# Altium PCB PCB2.PcbDoc
Units mm, origin at the board's own origin, x right, y up, seen from the top; angles counter-clockwise.
Board outline 144 x 100 mm, 2 copper layers (Top Layer, Bottom Layer); 28 components, 82 nets, 267 pads, 46 vias.
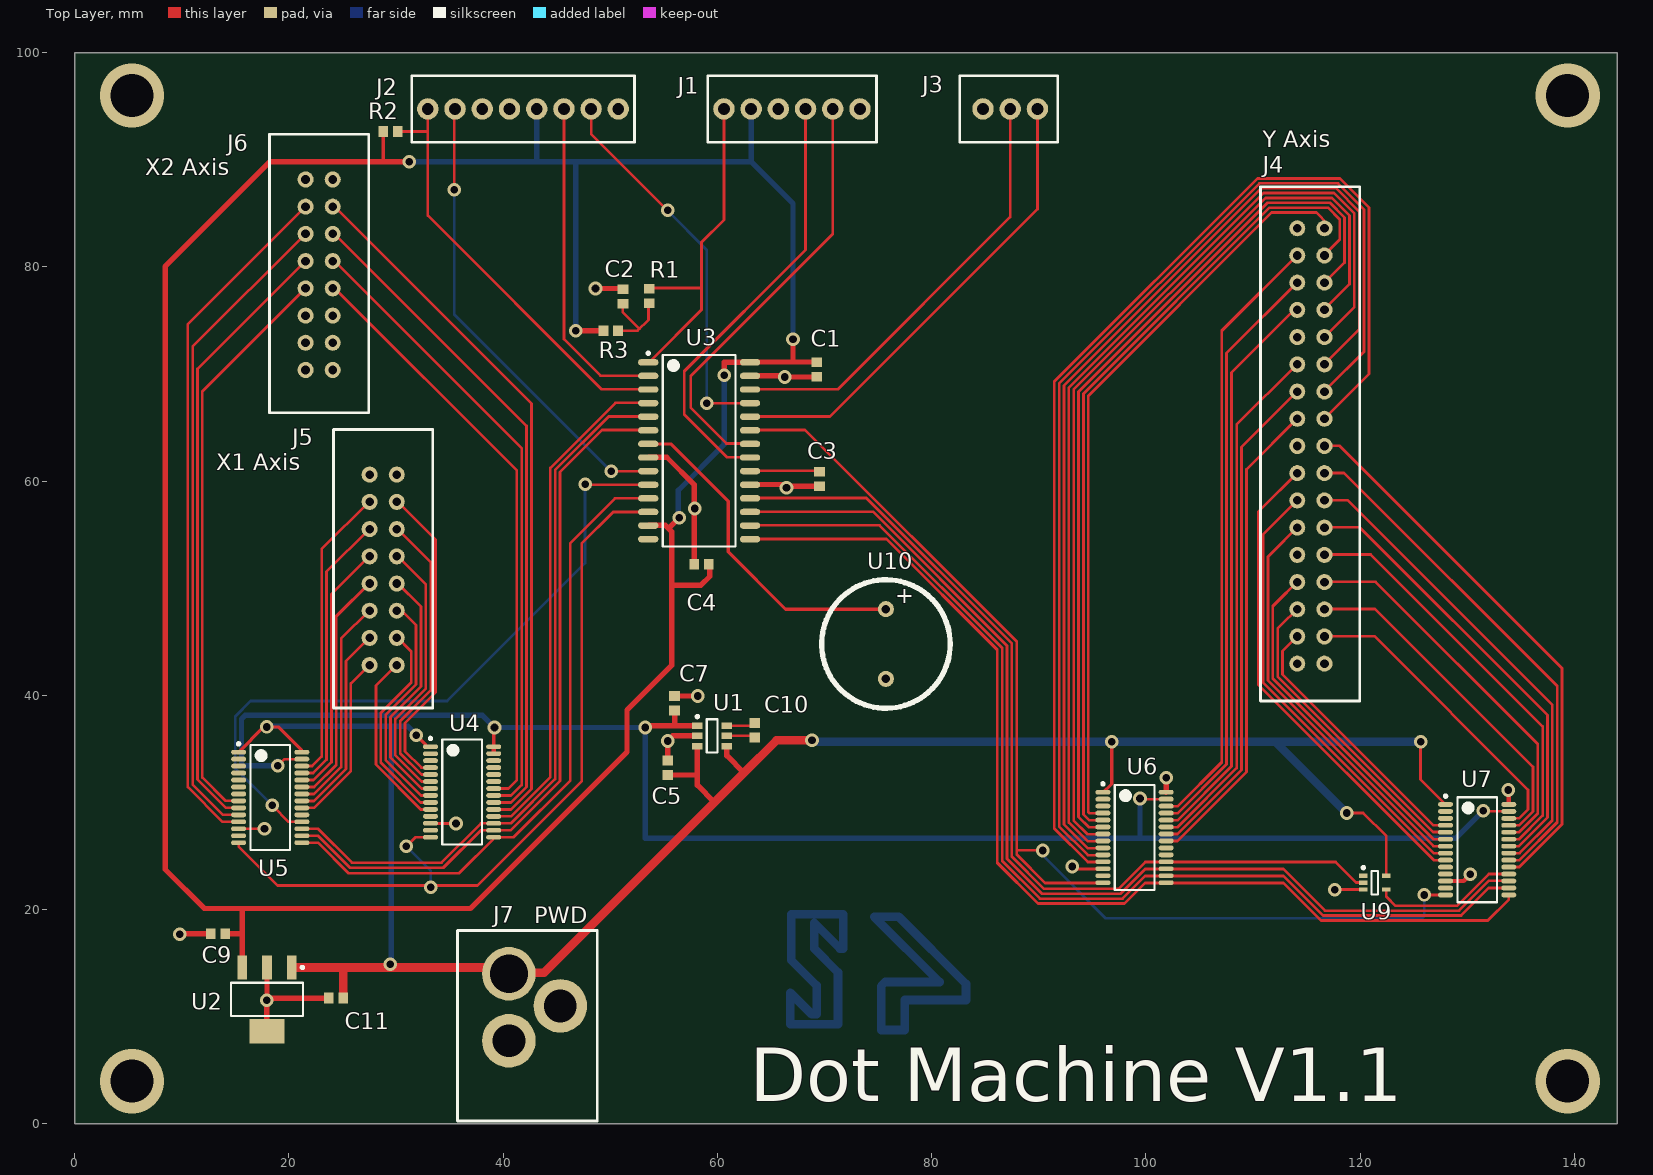
[diagram p0: Top Layer view]
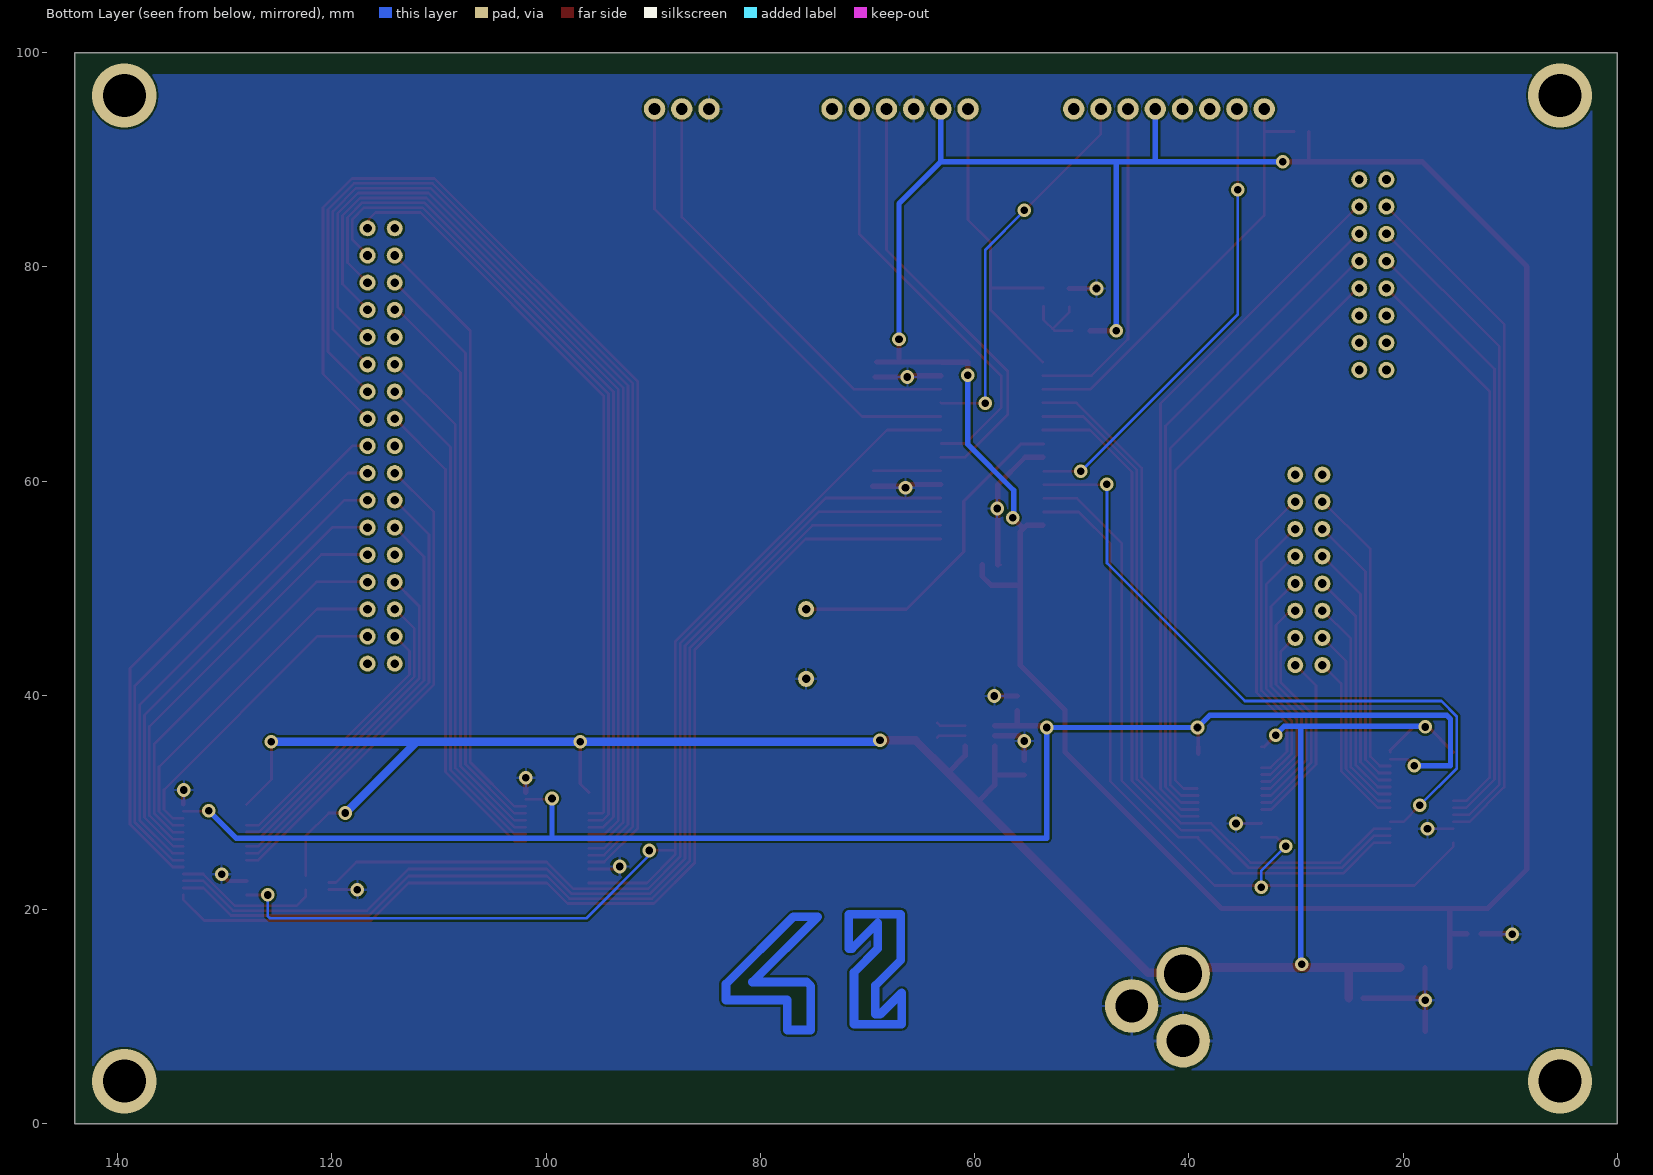
[diagram p1: Bottom Layer view, seen from below]

## Layer stack, top to bottom
Top Solder: solder mask 0.0102, Solder Resist, Dk 3.5
Top Layer: signal copper 0.0356
Dielectric 1: dielectric 0.32, FR-4, Dk 4.8
Bottom Layer: signal copper 0.0356
Bottom Solder: solder mask 0.0102, Solder Resist, Dk 3.5

## Board outline
0,0 144,0 144,100 0,100

## Design rules (kind name [scope] priority, off if disabled: settings)
Clearance [All] p1: gap=0.2
ComponentClearance [All] p1: gap=0.2 collisioncheckmode=3 verticalgap=0.2 showdistances=FALSE
HoleSize [All] p1: absolutevalues=TRUE maxlimit=10 minlimit=0.3 maxpercent=80.000 minpercent=20.000
MinimumSolderMaskSliver [All] p1: minsoldermaskwidth=0.2
PolygonConnect [All] p1: connectstyle=Relief reliefconductorwidth=0.254 reliefentries=4 polygonreliefangle="90 Angle" airgapwidth=0.254
RoutingVias [All] p1: holewidth=0.5 width=1.27 viastyle="Through Hole" minholewidth=0.3 minwidth=0.7 maxholewidth=10 maxwidth=10
SilkToSolderMaskClearance [IsPad] p1: minsilkscreentomaskgap=0.1 clearancetoexposedcopper=TRUE
SolderMaskExpansion [All] p1: expansion=0.102
UnpouredPolygon [All] p1: allowunpoured=FALSE
Width [All] p1: maxlimit=3 minlimit=0.2 preferedwidth=0.3
25 further rules are at their usual default settings.

## Classes and differential pairs
component class conectic_to_girouette: J4 J5 J6 U4 U5 U6 U7 U9
component class PIC: C1 C2 C3 C4 J1 J2 J3 R1 R2 R3 U3 U10
component class Power: C5 C7 C9 C10 C11 J7 U1 U2

## Components (designator, comment, footprint, x,y, rotation, side; value= is the part's Value field where it differs from the comment)
C1 "0.1uf" CAPC1608X09N 69.266,70.409 r90 top
C2 "0.1uf" CAPC1608X09N 51.181,77.241 r270 top
C3 "10uf" CAPC1608X09N 69.52,60.198 r270 top
C4 "0.1uF" CAPC1608X09N 58.522,52.248 r180 top
C5 "2.2uF" CAPC1608X09N 55.35,33.25 r270 top
C7 "2.2uF" CAPC1608X09N 56,39.275 r270 top
C9 "10uF" CAPC1608X09N 13.4,17.75 r0 top
C10 "1uF" CAPC1608X09N 63.475,36.75 r270 top
C11 "47uF" CAPC1608X09N 24.4,11.75 r0 top
J1 "Program/Debug" DEBUG 60.63,94.742 r0 top
J2 "Conecteur psx" PCBComponent_1 31.471,94.742 r0 top
J3 "connecteur uart" uart 89.865,94.742 r180 top
J4 "conecteur limande 34 fils" "HTSS-117-01-T-DV-P-TR Connecteur 34 pins" 115.325,83.475 r90 top
J5 "conecteur limande 16 fils" "M80-8541642 connecteur 16 pins" 28.8,42.825 r90 top
J6 "conecteur limande 16 fils" "M80-8541642 connecteur 16 pins" 22.825,70.375 r90 top
J7 "conecteur alimentation" "RAPC722X connecteur alimentation" 40.538,0.279 r0 top
R1 "1K" CAPC1608X09N 53.645,77.267 r90 top
R2 "200r" CAPC1608X09N 29.489,92.634 r0 top
R3 "10k" CAPC1608X09N 50.038,74.041 r180 top
U1 "inverseur" SOT95P280X145-6N 59.5,36.225 r0 top
U2 "regulateur tension" SOT230P710X180-4N 17.958,11.633 r270 top
U3 "PIC32MX170F256B-I/SO" SOIC127P1030X265-28N 58.293,62.84 r0 top
U4 "Multiplexer ADG1606" TSOP65P640X120-28N 36.17,30.988 r0 top
U5 "Multiplexer ADG1606" TSOP65P640X120-28N 18.263,30.48 r0 top
U6 "Multiplexer ADG1606" TSOP65P640X120-28N 98.933,26.746 r0 top
U7 "Multiplexer ADG1606" TSOP65P640X120-28N 130.912,25.603 r0 top
U9 "Porte NOT" SOT65P210X110-5N 121.361,22.53 r0 top
U10 "Buzzer" ABT-410-RC 75.725,44.8 r0 top

## Footprints (in the part's own frame and the unit in brackets; to place one, negate y for a bottom-side part, rotate by r counter-clockwise, add the part's x,y. Pads: shape width x height; smd on the part's side, far side on the other; paste and mask are expansions set on the pad)
ABT-410-RC [mm]
  round 1.5 hole 0.8: 1(0,3.25) 2(0,-3.25)
  silkscreen extent -6,-6 6,6
CAPC1608X09N [mm] "Chip Capacitor, 2-Leads, Body 1.60x0.80mm, IPC Medium Density"
  rect 0.9x1 smd: 1(-0.675,0) 2(0.675,0)
  body extent -0.87,-0.48 0.87,0.47, height 0.9
DEBUG [mm]
  round 2 hole 1.1: 1(-0.024,0) 2(2.516,0) 3(5.056,0) 4(7.596,0) 5(10.136,0) 6(12.676,0)
  silkscreen extent -1.52,-3.1 14.22,3.1
"HTSS-117-01-T-DV-P-TR Connecteur 34 pins" [mm]
  round 1.5 hole 0.8: 1(0.127,1.206) 2(0.127,-1.334) 3(-2.413,1.206) 4(-2.413,-1.334) 5(-4.953,1.206) 6(-4.953,-1.334) 7(-7.493,1.206) 8(-7.493,-1.334) 9(-10.033,1.206) 10(-10.033,-1.334) 11(-12.573,1.206) 12(-12.573,-1.334) 13(-15.113,1.206) 14(-15.113,-1.334) 15(-17.653,1.206) 16(-17.653,-1.334) 17(-20.193,1.206) 18(-20.193,-1.334) 19(-22.733,1.206) 20(-22.733,-1.334) 21(-25.273,1.206) 22(-25.273,-1.334) 23(-27.813,1.206) 24(-27.813,-1.334) 25(-30.353,1.206) 26(-30.353,-1.334) 27(-32.893,1.206) 28(-32.893,-1.334) 29(-35.433,1.206) 30(-35.433,-1.334) 31(-37.973,1.206) 32(-37.973,-1.334) 33(-40.513,1.206) 34(-40.513,-1.334)
  silkscreen extent -44,-4.63 4,4.63
"M80-8541642 connecteur 16 pins" [mm]
  round 1.5 hole 0.8: 1(17.78,1.27) 2(17.78,-1.27) 3(15.24,1.27) 4(15.24,-1.27) 5(12.7,1.27) 6(12.7,-1.27) 7(10.16,1.27) 8(10.16,-1.27) 9(7.62,1.27) 10(7.62,-1.27) 11(5.08,1.27) 12(5.08,-1.27) 13(2.54,1.27) 14(2.54,-1.27) 15(0,1.27) 16(0,-1.27)
  silkscreen extent -4,-4.63 22,4.63
PCBComponent_1 [mm]
  round 2 hole 1.1: 1(1.5,0) 2(4.04,0) 3(6.58,0) 4(9.12,0) 5(11.66,0) 6(14.2,0) 7(16.74,0) 8(19.28,0)
  silkscreen extent 0,-3.1 20.78,3.1
"RAPC722X connecteur alimentation" [mm]
  round 5 hole 3.56: 1(0,13.74)
  round 5 hole 3.05: 2(4.8,10.74) 3(0,7.49)
  silkscreen extent -4.8,0 8.25,17.78
SOIC127P1030X265-28N [mm] "SOIC, 28-Leads, Body 17.90x7.50mm, Pitch 1.27mm, IPC Medium Density"
  oval 1.9x0.6 smd: 1(-4.75,8.255) 2(-4.75,6.985) 3(-4.75,5.715) 4(-4.75,4.445) 5(-4.75,3.175) 6(-4.75,1.905) 7(-4.75,0.635) 8(-4.75,-0.635) 9(-4.75,-1.905) 10(-4.75,-3.175) 11(-4.75,-4.445) 12(-4.75,-5.715) 13(-4.75,-6.985) 14(-4.75,-8.255) 15(4.75,-8.255) 16(4.75,-6.985) 17(4.75,-5.715) 18(4.75,-4.445) 19(4.75,-3.175) 20(4.75,-1.905) 21(4.75,-0.635) 22(4.75,0.635) 23(4.75,1.905) 24(4.75,3.175) 25(4.75,4.445) 26(4.75,5.715) 27(4.75,6.985) 28(4.75,8.255)
  silkscreen extent -4.87,-8.95 3.4,9.23, body extent -3.8,-8.95 3.8,8.95, height 2.65
SOT65P210X110-5N [mm] "SOT23, 5-Leads, Body 2.00x2.10mm, Pitch 0.65mm, IPC Medium Density"
  rect 0.8x0.4 smd mask+0.13: 1(-1.075,0.65) 2(-1.075,0) 3(-1.075,-0.65)
  rect 0.8x0.4 smd: 4(1.075,-0.65) 5(1.075,0.65)
  silkscreen extent -1.2,-1.1 0.3,1.52, body extent -0.67,-1.1 0.67,1.1, height 1.1
SOT95P280X145-6N [mm] "SOT23, 6-Leads, Body 2.90x2.80mm, Pitch 0.95mm, IPC Medium Density"
  rect 1x0.6 smd mask+0.2: 1(-1.375,0.95) 2(-1.375,0) 3(-1.375,-0.95) 4(1.375,-0.95) 5(1.375,0) 6(1.375,0.95)
  silkscreen extent -1.5,-1.55 0.5,1.92, body extent -0.88,-1.52 0.87,1.53, height 1.45
SOT230P710X180-4N [mm] "SOT223, 4-Leads, Body 6.50x7.10mm (avg), Pitch 2.30mm, IPC Medium Density"
  rect 2.25x0.9 smd: 1(-2.975,2.3) 2(-2.975,0) 3(-2.975,-2.3)
  rect 2.25x3.25 smd: 4(2.975,0)
  silkscreen extent -3.1,-3.35 1.55,3.43, body extent -1.85,-3.35 1.85,3.35, height 1.8
TSOP65P640X120-28N [mm] "TSOP, 28-Leads, Body 9.70x4.40mm, Pitch 0.65mm, IPC Medium Density"
  oval 1.4x0.45 smd: 1(-2.95,4.225) 2(-2.95,3.575) 3(-2.95,2.925) 4(-2.95,2.275) 5(-2.95,1.625) 6(-2.95,0.975) 7(-2.95,0.325) 8(-2.95,-0.325) 9(-2.95,-0.975) 10(-2.95,-1.625) 11(-2.95,-2.275) 12(-2.95,-2.925) 13(-2.95,-3.575) 14(-2.95,-4.225) 15(2.95,-4.225) 16(2.95,-3.575) 17(2.95,-2.925) 18(2.95,-2.275) 19(2.95,-1.625) 20(2.95,-0.975) 21(2.95,-0.325) 22(2.95,0.325) 23(2.95,0.975) 24(2.95,1.625) 25(2.95,2.275) 26(2.95,2.925) 27(2.95,3.575) 28(2.95,4.225)
  silkscreen extent -3.07,-4.9 1.85,5.12, body extent -2.25,-4.9 2.25,4.9, height 1.2
uart [mm]
  round 2 hole 1.1: 1(0,0) 2(2.54,0) 3(5.08,0)
  silkscreen extent -1.91,-3.1 7.24,3.1

## Part data
C1 C2 C3 C4 C5 C7 C9 C10 C11: library part Cap, "Capacitor"
J1 J2 U4 U5: library part Component_1
J4: library part "Limande 34 fils"
J5 J6: library part "Connecteur carte a carte"
R1: library part Res3, "Resistor"
R2 R3: library part Res1, "Resistor"
U3: library part PICMX1XX
U6 U7: library part ADG1606

## Via types
v1: diameter 1.27, hole 0.711, Top Layer to Bottom Layer, 41 vias
v2: diameter 6, hole 4, Top Layer to Bottom Layer, 4 vias
v3: diameter 1.27, hole 0.711, Top Layer to Bottom Layer, tented both sides, 1 vias

## Nets (pads, with @x,y where several pads share a name; then routed paths per layer and width w, separated by ;. In a path a pad name is that pad's centre, name@x,y a point inside that pad or via, vN(x,y) a via of type N, cw(c..) or ccw(c..) an arc to the next point about the centre after c; other vN are vias at no path point)
A0: U3.5 U4.17 U5.17 | length 67.9
  Top Layer w0.254: U5.17 22.712,27.555 25.879,24.388 34.242,24.388 37.917,28.063 40.71,28.063 44.854,32.207 44.854,61.037 49.857,66.04 U3.5@53.645,66.04
A1: U3.6 U4.16 U5.16 | length 67.5
  Top Layer w0.254: U5.16 22.72,26.905 25.71,23.915 34.411,23.915 37.909,27.413 40.702,27.413 45.308,32.019 45.308,60.849 49.229,64.77 U3.6@53.645,64.77
A2: U3.11 U4.15 U5.15 | length 61
  Top Layer w0.254: U5.15 22.727,26.255 25.581,23.402 35.887,23.402 U4.15@39.184,26.699 ; U4.15 40.983,26.763 46.25,32.03 46.25,54.2 50.445,58.395 U3.11
A3: U3.12 U4.14 U5.14 | length 74.9
  Top Layer w0.254: U5.14 15.313,25.886 18.945,22.254 37.592,22.254 47.325,31.987 47.325,54.175 50.275,57.125 U3.12 ; v1(30.963,25.908) 31.818,26.763 U4.14
  Bottom Layer w0.254: v1(30.963,25.908) 33.249,23.622 v1(33.249,22.098)
"A EN": U3.4 U4.18 | length 47.4
  Top Layer w0.254: U4.18 40.718,28.713 44.4,32.395 44.4,61.225 50.485,67.31 U3.4@53.645,67.31
B0: U3.17 U6.17 U7.17 | length 100.8
  Top Layer w0.254: U3.17@63.145,57.15 74.516,57.15 87.027,44.639 87.027,24.757 90.294,21.49 97.625,21.49 99.931,23.796 112.82,23.796 116.708,19.907 129.224,19.907 132.025,22.708 U7.17@133.832,22.708
B1: U3.16 U6.16 U7.16 | length 100.3
  Top Layer w0.254: U3.16@63.145,55.88 75.144,55.88 86.573,44.451 86.573,24.569 90.106,21.036 97.813,21.036 99.923,23.146 112.827,23.146 116.52,19.453 129.412,19.453 131.987,22.028 U7.16
B2: U3.15 U6.15 U7.15 | length 99.9
  Top Layer w0.254: U3.15@63.145,54.61 75.772,54.61 86.119,44.263 86.119,24.381 89.918,20.582 98.001,20.582 99.915,22.496 112.835,22.496 116.332,18.999 131.899,18.999 133.862,20.962 U7.15
B3: U3.23 U6.14 U7.14 | length 107
  Top Layer w0.254: U3.23@63.145,64.77 68.18,64.77 87.935,45.015 87.935,25.552 ; v1(90.373,25.527) 90.348,25.552 87.935,25.552 ; U6.14@96.008,22.496 90.572,22.496 87.935,25.133 87.935,25.552 ; v1@125.959,21.361 v1(125.975,21.378) U7.14
  Bottom Layer w0.254: v1(90.373,25.527) 90.373,25.044 96.215,19.202 125.755,19.202 125.975,19.422 v1(125.975,21.378)
"B EN": U3.18 U6.18 U9.2 | length 85.7
  Top Layer w0.254: U3.18@63.145,58.42 73.888,58.42 87.481,44.827 87.481,24.945 90.482,21.944 97.437,21.944 99.939,24.446 117.704,24.446 119.62,22.53 U9.2
BUZZER: U3.7 U10.1 | length 31.3
  Top Layer w0.3: U3.7 55.65,63.475 61,58.125 61,53.4 66.35,48.05 U10.1
"C EN": U3.10 U5.18 | length 64.9
  Top Layer w0.254: v1@18.5,29.675 19.97,28.205 U5.18 ; v1@47.71,59.665 U3.10
  Bottom Layer w0.254: v1@18.525,29.66 14.998,33.187 14.998,38.034 16.439,39.475 34.775,39.475 47.649,52.349 v1(47.649,59.726)
  other v1: 18.438,29.737
CLOCK: J2.7 U3.25 | length 36.1
  Top Layer w0.254: J2.7 48.211,92.404 v1(55.347,85.268) ; v1(59,67.275) 63.11,67.275 U3.25@63.145,67.31
  Bottom Layer w0.254: v1@55.347,85.242 59,81.589 v1(59,67.275)
"COLOR SECURE Y": U7.18 U9.4 | length 13.7
  Top Layer w0.254: U9.4@122.428,21.872 122.428,21.209 123.276,20.361 129.036,20.361 132.003,23.328 U7.18
GND: C1.1 C2.1 C3.2 C4.2 C5.1 C7.1 C9.1 C11.1 J1.3 J2.4 J3.3 J7.2 J7.3 U1.2 U2.2 U2.4 U3.8 U3.19 U3.27 U4.12 U5.12 U6.12 U6.28 U7.12 U7.28 U9.3 U10.2 | length 65.9
  Top Layer w0.254: U5.12 17.725,27.555 v1(17.729,27.559) ; C4.2@57.584,52.197 C4.2@57.85,52.197 ; v1@66.142,59.69 v1(66.445,59.387) ; v1(93.116,24.028) 93.349,23.796 U6.12@96.008,23.796 ; v1(117.602,21.869) 118.041,21.869 118.051,21.88 U9.3 ; v1@133.435,31.175 v1(133.8,31.175)
  Top Layer w0.3: U2.2 U2.2@18.009,14.659 ; U4.12 33.233,28.05 v1(35.6,28.05)
  Top Layer w0.4: U7.12 129.653,22.678 v1(130.275,23.3) ; U7.28 v1@133.862,31.113
  Top Layer w0.5: v1(9.825,17.7) 9.875,17.75 C9.1 ; U2.4 17.95,8.666 v1(17.95,11.55) v1@17.958,11.558 ; U2.2 v1@17.958,11.558 ; C11.1 18.15,11.75 v1@17.958,11.558 ; v1(48.616,77.978) C2.1@51.156,77.978 ; U3.8@53.645,62.23 55.27,62.23 57.85,59.65 C4.2@57.85,52.197 ; C5.1 v1(55.35,35.75) 55.825,36.225 U1.2 ; C7.1 v1(58.15,39.95) ; U3.19@63.145,59.69 v1@66.142,59.69 ; U3.27@63.145,69.85 v1@66.142,69.85 ; v1(66.269,69.723) C1.1@69.266,69.723 ; v1(66.445,59.387) 66.581,59.523 C3.2 ; U6.28 v1@101.883,32.317
  other v1: 101.875,32.325 57.9,57.45
"IN UART": J3.1 U3.24 | length 44.1
  Top Layer w0.254: U3.24@63.145,66.04 70.515,66.04 89.865,85.39 J3.1
MCLR: J1.1 R1.2 U3.1 | length 31.4
  Top Layer w0.254: R1.2@53.569,78.027 58.473,78.027 ; U3.1@53.645,71.12 58.522,75.997 58.522,82.296 60.606,84.38 J1.1
MISO1: J2.1 R2.2 U3.3 | length 40.2
  Top Layer w0.254: R2.2 32.971,92.634 ; J2.1 32.971,92.634 ; U3.3@53.645,68.58 49.17,68.58 32.971,84.779 32.971,92.634
MOSI1: J2.2 U3.9 | length 43.4
  Top Layer w0.254: v1(35.425,87.2) 35.425,94.656 J2.2 ; v1(50.075,60.925) 53.533,60.925 U3.9
  Bottom Layer w0.254: v1(35.425,87.2) 35.425,75.575 v1(50.075,60.925)
NetC2_2: C2.2 R1.1 R3.1 | length 7.1
  Top Layer w0.254: R3.1@50.902,74.041 52.553,74.041 53.569,75.057 R1.1@53.569,76.327 ; C2.2@51.156,76.278 51.156,75.794 52.73,74.219
NetC3_1: C3.1 U3.20 | length 6.3
  Top Layer w0.254: U3.20@63.145,60.96 C3.1@69.444,60.96
NetC10_1: C10.1 U1.6 | length 2.7
  Top Layer w0.254: U1.6 63.225,37.175 C10.1
NetC10_2: C10.2 U1.5 | length 2.7
  Top Layer w0.254: U1.5 63.325,36.225 C10.2
NetJ4_2: J4.2 U6.4 | length 70.2
  Top Layer w0.254: U6.4@96.008,28.996 94.713,28.996 94.615,29.094 94.615,67.97 111.72,85.075 115.903,85.075 J4.2@117.006,83.972
NetJ4_3: J4.3 U6.26 | length 57.6
  Top Layer w0.254: U6.26@101.908,29.646 102.95,29.646 107.067,33.763 107.067,74.034 J4.3@114.466,81.432
NetJ4_4: J4.4 U6.5 | length 76.9
  Top Layer w0.254: U6.5@96.008,28.346 94.721,28.346 94.161,28.906 94.161,68.158 111.532,85.529 116.972,85.529 118.083,84.419 118.083,82.561 J4.4@116.609,81.087
NetJ4_5: J4.5 U6.25 | length 55.7
  Top Layer w0.254: U6.25@101.908,28.996 102.942,28.996 107.521,33.575 107.521,71.948 J4.5@114.466,78.892
NetJ4_6: J4.6 U6.6 | length 82
  Top Layer w0.254: U6.6@96.008,27.696 94.674,27.696 93.707,28.663 93.707,68.347 111.343,85.983 117.16,85.983 118.537,84.607 118.537,80.412 118.525,80.4 118.525,80.388 J4.6
NetJ4_7: J4.7 U6.24 | length 53.2
  Top Layer w0.254: U6.24@101.908,28.346 102.934,28.346 107.975,33.387 107.975,70.125 J4.7@113.857,76.007
NetJ4_8: J4.8 U6.7 | length 87.1
  Top Layer w0.254: U6.7@96.008,27.046 94.544,27.046 93.253,28.337 93.253,68.535 111.155,86.437 117.348,86.437 118.991,84.795 118.991,78.389 J4.8@116.621,76.019
NetJ4_10: J4.10 U6.8 | length 92.2
  Top Layer w0.254: U6.8@96.008,26.396 94.552,26.396 92.799,28.149 92.799,68.723 110.967,86.891 117.536,86.891 119.445,84.983 119.445,76.251 J4.10@116.642,73.449
NetJ4_11: J4.11 U6.23 | length 48.8
  Top Layer w0.254: U6.23@101.908,27.696 102.926,27.696 108.464,33.234 108.464,65.271 J4.11@114.095,70.901
NetJ4_12: J4.12 U6.9 | length 96.7
  Top Layer w0.254: U6.9@96.008,25.746 94.56,25.746 92.345,27.961 92.345,68.911 110.779,87.345 117.724,87.345 119.899,85.171 119.899,74.165 J4.12@117.006,71.272
NetJ4_13: J4.13 U6.22 | length 47
  Top Layer w0.254: U6.22 102.944,27.071 108.918,33.046 108.918,63.185 J4.13@114.095,68.361
NetJ4_14: J4.14 U6.10 | length 101.8
  Top Layer w0.254: U6.10@96.008,25.096 94.568,25.096 91.891,27.773 91.891,69.099 110.591,87.799 117.912,87.799 120.353,85.359 120.353,72.079 J4.14@117.006,68.732
NetJ4_15: J4.15 U6.21 | length 45.1
  Top Layer w0.254: U6.21 102.936,26.421 109.372,32.858 109.372,61.099 J4.15@114.095,65.821
NetJ4_16: J4.16 U6.11 | length 106.8
  Top Layer w0.254: U6.11@96.008,24.446 94.576,24.446 91.437,27.585 91.437,69.287 110.403,88.253 118.1,88.253 120.807,85.547 120.807,69.993 J4.16@117.006,66.192
NetJ4_18: J4.18 U7.19 | length 52
  Top Layer w0.254: J4.18@116.609,63.307 118.068,63.307 138.836,42.539 138.836,27.977 134.838,23.978 U7.19
NetJ4_19: J4.19 U7.9 | length 46
  Top Layer w0.254: J4.19@114.466,61.112 110.465,57.111 110.465,41.021 126.857,24.628 U7.9
NetJ4_20: J4.20 U7.20 | length 48.7
  Top Layer w0.254: J4.20@116.609,60.767 118.483,60.767 138.382,40.868 138.382,28.165 134.846,24.628 U7.20
NetJ4_21: J4.21 U7.8 | length 42.5
  Top Layer w0.254: J4.21@114.466,58.572 110.919,55.025 110.919,41.209 126.849,25.278 U7.8
NetJ4_22: J4.22 U7.21 | length 44.6
  Top Layer w0.254: J4.22@117.351,58.227 118.811,58.227 137.928,39.11 137.928,28.353 134.854,25.278 U7.21
NetJ4_23: J4.23 U7.7 | length 38.9
  Top Layer w0.254: J4.23@114.466,56.032 111.38,52.947 111.38,41.39 126.842,25.928 U7.7
NetJ4_24: J4.24 U7.22 | length 41.7
  Top Layer w0.254: J4.24@117.351,55.687 119.954,55.687 137.474,38.167 137.474,28.607 134.795,25.928 U7.22
NetJ4_26: J4.26 U7.23 | length 38.7
  Top Layer w0.254: J4.26@117.351,53.147 120.97,53.147 137.02,37.097 137.02,28.795 134.803,26.578 U7.23
NetJ4_27: J4.27 U7.6 | length 32.8
  Top Layer w0.254: J4.27@114.466,50.952 111.834,48.321 111.834,41.578 126.834,26.578 U7.6
NetJ4_28: J4.28 U7.24 | length 35.4
  Top Layer w0.254: J4.28@117.351,50.607 121.427,50.607 136.566,35.468 136.566,28.983 134.811,27.228 U7.24
NetJ4_29: J4.29 U7.5 | length 29.3
  Top Layer w0.254: J4.29@114.466,48.412 112.288,46.235 112.288,41.766 126.796,27.258 127.962,27.258 U7.5
NetJ4_30: J4.30 U7.25 | length 31.8
  Top Layer w0.254: J4.30@117.351,48.067 121.376,48.067 136.112,33.331 136.112,29.171 134.819,27.878 U7.25
NetJ4_31: J4.31 U7.4 | length 25.7
  Top Layer w0.254: J4.31@114.466,45.872 112.742,44.149 112.742,41.954 126.818,27.878 U7.4
NetJ4_32: J4.32 U7.26 | length 28.2
  Top Layer w0.254: J4.32@117.351,45.527 121.323,45.527 135.658,31.192 135.658,29.359 134.827,28.528 U7.26
NetJ5_3: J5.3 U5.26 | length 27.9
  Top Layer w0.254: U5.26 22.178,33.405 23.063,34.29 23.063,53.648 J5.3@27.555,58.14
NetJ5_4: J5.4 U4.4 | length 29
  Top Layer w0.254: J5.4@30.095,58.14 33.692,54.543 33.692,40.267 30.849,37.424 30.849,34.785 32.371,33.263 U4.4
NetJ5_5: J5.5 U5.25 | length 26.1
  Top Layer w0.254: U5.25 22.265,32.755 23.517,34.007 23.517,51.562 J5.5@27.555,55.6
NetJ5_6: J5.6 U4.5 | length 27.1
  Top Layer w0.254: J5.6@30.095,55.6 33.238,52.457 33.238,40.455 30.395,37.612 30.395,34.597 32.379,32.613 U4.5
NetJ5_7: J5.7 U5.24 | length 24.2
  Top Layer w0.254: U5.24 22.301,32.105 23.971,33.776 23.971,49.476 J5.7@27.555,53.06
NetJ5_8: J5.8 U4.6 | length 25.2
  Top Layer w0.254: J5.8@30.095,53.06 32.784,50.371 32.784,40.643 29.941,37.8 29.941,34.409 32.387,31.963 U4.6
NetJ5_9: J5.9 U5.23 | length 22.4
  Top Layer w0.254: U5.23 22.362,31.455 24.425,33.518 24.425,47.39 J5.9@27.555,50.52
NetJ5_10: J5.10 U4.7 | length 23.3
  Top Layer w0.254: J5.10@30.095,50.52 32.33,48.285 32.33,40.831 29.487,37.988 29.487,34.22 32.394,31.313 U4.7
NetJ5_11: J5.11 U5.22 | length 20.5
  Top Layer w0.254: U5.22 22.354,30.805 24.879,33.33 24.879,45.304 J5.11@27.555,47.98
NetJ5_12: J5.12 U4.8 | length 21.7
  Top Layer w0.254: J5.12@30.095,47.98 30.47,47.98 31.876,46.574 31.876,41.019 29.033,38.176 29.033,33.959 32.329,30.663 U4.8
NetJ5_13: J5.13 U5.21 | length 18.6
  Top Layer w0.254: U5.21@21.218,30.15 22.341,30.15 25.333,33.142 25.333,43.218 J5.13@27.555,45.44
NetJ5_14: J5.14 U4.9 | length 19.6
  Top Layer w0.254: J5.14@30.095,45.44 31.422,44.113 31.422,41.207 28.579,38.364 28.579,33.734 32.3,30.013 U4.9
NetJ5_15: J5.15 U5.20 | length 16.7
  Top Layer w0.254: U5.20 22.338,29.505 25.787,32.954 25.787,41.132 J5.15@27.555,42.9
NetJ5_16: J5.16 U4.10 | length 17
  Top Layer w0.254: J5.16@30.095,42.9 28.125,40.93 28.125,33.546 32.308,29.363 U4.10
NetJ6_3: J6.3 U5.11 | length 64.9
  Top Layer w0.254: U5.11 13.807,28.205 10.566,31.445 10.566,74.651 J6.3@21.63,85.715
NetJ6_4: J6.4 U4.19 | length 66.4
  Top Layer w0.254: J6.4@24.17,85.715 42.637,67.248 42.637,31.274 40.726,29.363 U4.19
NetJ6_5: J6.5 U5.10 | length 61.4
  Top Layer w0.254: U5.10 13.842,28.855 11.02,31.677 11.02,72.565 J6.5@21.63,83.175
NetJ6_6: J6.6 U4.20 | length 62.8
  Top Layer w0.254: J6.6@24.17,83.175 42.183,65.162 42.183,31.462 40.734,30.013 40.554,30.013 ; U4.20 40.497,30.013
NetJ6_7: J6.7 U5.9 | length 57.6
  Top Layer w0.254: U5.9 14.121,29.505 11.474,32.152 11.474,70.479 J6.7@21.63,80.635
NetJ6_8: J6.8 U4.21 | length 59.3
  Top Layer w0.254: J6.8@24.17,80.635 41.729,63.076 41.729,31.65 40.742,30.663 U4.21
NetJ6_9: J6.9 U5.8 | length 54
  Top Layer w0.254: U5.8@15.299,30.169 14.099,30.169 11.928,32.34 11.928,68.393 J6.9@21.63,78.095
NetJ6_10: J6.10 U4.22 | length 55.5
  Top Layer w0.254: J6.10@24.17,78.095 41.275,60.99 41.275,32.088 40.5,31.313 U4.22@39.218,31.313
"OUT UART": J3.2 U3.26 | length 40.9
  Top Layer w0.254: U3.26@63.145,68.58 71.265,68.58 87.325,84.64 J3.2
PGC: J1.5 U3.22 | length 40.4
  Top Layer w0.254: U3.22@63.121,63.524 60.834,63.524 57.5,66.858 57.5,69.794 70.766,83.059 J1.5
PGD: J1.4 U3.21 | length 41.1
  Top Layer w0.254: U3.21@63.145,62.23 60.909,62.23 56.9,66.239 56.9,70.26 68.226,81.586 J1.4
SS1: J2.6 U3.2 | length 30.9
  Top Layer w0.254: J2.6 45.671,73.252 49.073,69.85 U3.2@53.645,69.85
U2RX: 
U2TX: 
V+: C5.2 C11.2 J7.1 U1.3 U1.4 U2.1 U4.1 U5.1 U5.28 U6.1 U7.1 U9.5 | length 205
  Top Layer w0.254: U5.28 U5.28@21.213,34.871 ; U4.1@32.961,35.213 U4.1 ; v1(118.725,29.025) 120.272,29.025 122.436,26.861 U9.5 ; v1(125.628,35.662) 125.628,32.161 U7.1
  Top Layer w0.3: U5.1 17.666,37.059 v1(17.932,37.059) 19.025,37.059 U5.28@21.213,34.871 ; v1(31.902,36.271) U4.1@32.961,35.213 ; U6.1@96.008,30.946 96.799,31.737 v1(96.799,35.662)
  Top Layer w0.5: C5.2 58.125,32.575 ; U1.3 58.125,32.575 ; 59.725,30.025 58.125,31.625 58.125,32.575 ; U1.4 60.875,34.375 62.475,32.775
  Top Layer w0.8: U2.1 25.075,14.608 ; C11.2 25.075,14.608 ; v1(68.825,35.8) 65.5,35.8 62.475,32.775 59.725,30.025 43.819,14.119 40.538,14.119 J7.1 39.95,14.608 25.075,14.608
  Bottom Layer w0.254: v1(125.628,35.662) v1@125.679,35.662
  Bottom Layer w0.5: v1@17.932,36.982 v1(17.932,37.059) ; v1@17.932,37.109 29.566,37.109 ; v1@29.493,15.262 29.566,15.335 29.566,37.109 ; v1@31.928,36.297 31.115,37.109 29.566,37.109
  Bottom Layer w0.8: v1@68.825,35.662 v1(96.799,35.662) 112.088,35.662 ; v1(118.725,29.025) 112.088,35.662 ; v1(125.628,35.662) 112.088,35.662
  other v1: 29.464,14.91
V-: C7.2 U1.1 U4.27 U4.28 U5.27 U6.27 U7.27 | length 155.7
  Top Layer w0.254: v3(18.948,33.426) 19.577,34.055 U5.27 ; v1@39.12,36.935 v1(39.192,37.008) ; v1(53.264,37.008) v1@53.431,37.175 ; v1@99.504,30.321 U6.27 ; v1@131.547,29.178 U7.27
  Top Layer w0.3: U4.28 v1@39.12,36.935
  Top Layer w0.4: U4.27 U4.28
  Top Layer w0.5: v1@53.431,37.175 56,37.175 ; C7.2 56,37.175 ; U1.1 56,37.175
  Bottom Layer w0.254: v1@99.325,30.266 v1(99.442,30.383)
  Bottom Layer w0.5: v3@18.948,33.873 18.502,33.426 15.575,33.426 15.575,37.795 15.923,38.144 38.056,38.144 v1(39.192,37.008) v1(53.264,37.008) 53.264,26.686 128.932,26.686 v1(131.485,29.24) ; 99.442,26.694 v1(99.442,30.383)
VCC: C1.2 C4.1 C9.2 J1.2 J2.5 R2.1 R3.2 U2.3 U3.13 U3.28 | length 278.7
  Top Layer w0.254: 15.608,17.75 15.658,17.7 ; 15.658,20.1 15.675,20.117
  Top Layer w0.3: 28.814,89.836 R2.1
  Top Layer w0.5: C9.2 15.608,17.75 ; U2.3 15.658,17.7 15.658,20.1 ; v1(31.231,89.825) 18.248,89.825 8.458,80.035 8.458,23.774 12.116,20.117 15.675,20.117 36.942,20.117 51.556,34.731 51.556,38.627 55.728,42.799 55.728,50.292 ; v1(46.787,74.041) R3.2@49.202,74.041 ; U3.13@53.645,55.88 55.143,55.88 55.435,55.588 ; v1(56.448,56.6) 55.435,55.588 ; C4.1@59.284,52.197 59.284,51.105 58.471,50.292 55.728,50.292 ; v1(60.625,69.9) 60.625,71.1 ; 60.63,71.095 U3.28 ; U3.28@63.145,71.12 67.056,71.12 ; v1(67.056,73.254) 67.056,71.12 ; C1.2@69.141,71.12 67.056,71.12 ; 55.435,55.588 55.728,55.296 55.728,50.292
  Bottom Layer w0.254: 43.129,89.825 43.131,89.827
  Bottom Layer w0.5: v1(31.231,89.825) 43.129,89.825 46.787,89.825 ; 43.131,89.827 J2.5 ; v1(46.787,74.041) 46.787,89.825 ; v1(56.448,56.6) 56.35,56.698 56.35,59.15 60.625,63.425 v1(60.625,69.9) ; 63.134,89.825 67.056,85.903 v1(67.056,73.254) ; J1.2@63.146,93.777 63.146,89.825 46.787,89.825
pads on no net: J1.6 J2.3 J2.8 J4.1 J4.9 J4.17 J4.25 J4.33 J4.34 J5.1 J5.2 J6.1 J6.2 J6.11 J6.12 J6.13 J6.14 J6.15 J6.16 U3.14 U4.2 U4.3 U4.11 U4.13 U4.23 U4.24 U4.25 U4.26 U5.2 U5.3 U5.4 U5.5 U5.6 U5.7 U5.13 U5.19 U6.2 U6.3 U6.13 U6.19 U6.20 U7.2 U7.3 U7.10 U7.11 U7.13 U9.1
copper on no net: | length 84.8
  Bottom Layer w0.8: 66.8,9.325 71.25,9.325 71.25,14.15 69.05,16.35 69.05,16.375 69.05,18.762 71.437,16.375 71.75,16.375 71.75,19.575 66.9,19.575 66.875,19.55 66.875,15.3 66.925,15.25 69.25,12.925 69.25,12.825 69.25,10.25 68.8,10.25 66.8,12.25 66.8,9.325 ; 74.625,19.35 76.925,19.35 83.2,13.075 83.2,11.575 77.5,11.575 77.5,11.15 77.5,8.775 75.275,8.775 75.275,11.875 75.275,12.875 75.65,13.25 80.725,13.25 74.625,19.35
  other v2: 5.355,4 139.355,4 5.355,96 139.355,96

## Polygon pours and split planes (outlines as drawn)
GND on Bottom Layer "GND" (solid, remove dead copper, pour order 4): 2.355,5 142.355,5 142.355,98 2.355,98

## Silkscreen, mask and mechanical layers (free items; w line width, h text height)
Top Overlay:
  text "Y Axis" at 110.9,91.15 h1.52
  text "X2 Axis" at 6.575,88.55 h1.52
  text "X1 Axis" at 13.225,61 h1.52
  text "PWD" at 42.9,18.75 h1.52
  text "Dot Machine V1.1" at 63.025,2.125 h5
Mechanical 15:
  lines w0.254: -7.133,1.638 -6.625,0.114 ; -7.133,98.59 -6.625,100.114 ; -6.879,0.114 -6.371,0.114 ; -6.879,100.114 -6.371,100.114 ; -6.625,44.375 -6.625,0.114 ; -6.625,55.852 -6.625,100.114 ; -6.117,1.638 -6.625,0.114 ; -6.117,98.59 -6.625,100.114 ; -0.164,105.196 -0.164,105.704 ; 1.36,104.942 -0.164,105.45 ; 1.36,105.958 -0.164,105.45 ; 66.098,105.45 -0.164,105.45 ; 77.575,105.45 143.836,105.45 ; 142.312,104.942 143.836,105.45 ; 142.312,105.958 143.836,105.45 ; 143.836,105.196 143.836,105.704
  text "144 (mm)" at 66.352,104.536 h1.52
  text "100 (mm)" at -7.539,55.598 h1.52 r270
Drill Drawing:
  circle w0.025: c154.19,6.188 r0.635
  lines w0.025: 153.555,9.363 154.825,9.363 154.825,10.633 153.555,10.633 153.555,9.363 ; 153.555,14.443 154.825,14.443 154.19,13.173 153.555,14.443 ; 153.555,16.983 153.555,17.3 153.873,17.618 153.555,17.935 153.555,18.253 153.873,18.253 154.19,17.935 154.508,18.253 154.825,18.253 154.825,17.935 154.508,17.618 154.825,17.3 154.825,16.983 154.508,16.983 154.19,17.3 153.873,16.983 153.555,16.983 ; 153.555,20.793 154.19,21.11 154.825,20.793 154.508,21.428 154.825,22.063 154.19,21.745 153.555,22.063 153.873,21.428 153.555,20.793 ; 153.555,24.92 153.873,24.92 153.873,24.603 154.508,24.603 154.508,24.92 154.825,24.92 154.825,25.555 154.508,25.555 154.508,25.873 153.873,25.873 153.873,25.555 153.555,25.555 153.555,24.92
  lines w0.381: 151.825,4.41 250.351,4.41 ; 151.825,27.27 250.351,27.27 ; 165.817,0.6 165.817,31.08 ; 183.542,0.6 183.542,31.08 ; 217.72,0.6 217.72,31.08 ; 230.569,0.6 230.569,31.08 ; 151.825,0.6 250.351,0.6 250.351,31.08 151.825,31.08 151.825,0.6
  text "Symbol" at 154.111,28.413 h1.83
  text "Hit Count" at 166.96,28.413 h1.83
  text "Finished Hole Size" at 184.685,28.413 h1.83
  text "Plated" at 218.863,28.413 h1.83
  text "Hole Type" at 231.712,28.413 h1.83
  text "1" at 166.96,24.603 h1.52
  text "3.560mm (140.16mil)" at 184.685,24.603 h1.52
  text "PTH" at 218.863,24.603 h1.52
  text "Round" at 231.712,24.603 h1.52
  text "2" at 166.96,20.793 h1.52
  text "3.050mm (120.08mil)" at 184.685,20.793 h1.52
  text "PTH" at 218.863,20.793 h1.52
  text "Round" at 231.712,20.793 h1.52
  text "4" at 166.96,16.983 h1.52
  text "4.000mm (157.48mil)" at 184.685,16.983 h1.52
  text "PTH" at 218.863,16.983 h1.52
  text "Round" at 231.712,16.983 h1.52
  text "17" at 166.96,13.173 h1.52
  text "1.100mm (43.31mil)" at 184.685,13.173 h1.52
  text "PTH" at 218.863,13.173 h1.52
  text "Round" at 231.712,13.173 h1.52
  text "42" at 166.96,9.363 h1.52
  text "0.711mm (28.00mil)" at 184.685,9.363 h1.52
  text "PTH" at 218.863,9.363 h1.52
  text "Round" at 231.712,9.363 h1.52
  text "68" at 166.96,5.553 h1.52
  text "0.800mm (31.50mil)" at 184.685,5.553 h1.52
  text "PTH" at 218.863,5.553 h1.52
  text "Round" at 231.712,5.553 h1.52
  text "134 Total" at 166.96,1.743 h1.52
Mechanical 32:
  the board outline again, w0.3

## Text inside footprints (layer, text, board x,y; h text height)
U10: Top Overlay "+" at 76.614,48.61 h1.52